# EAGLE board HITB_AMS_V1.3 (EAGLE 8.7.0)
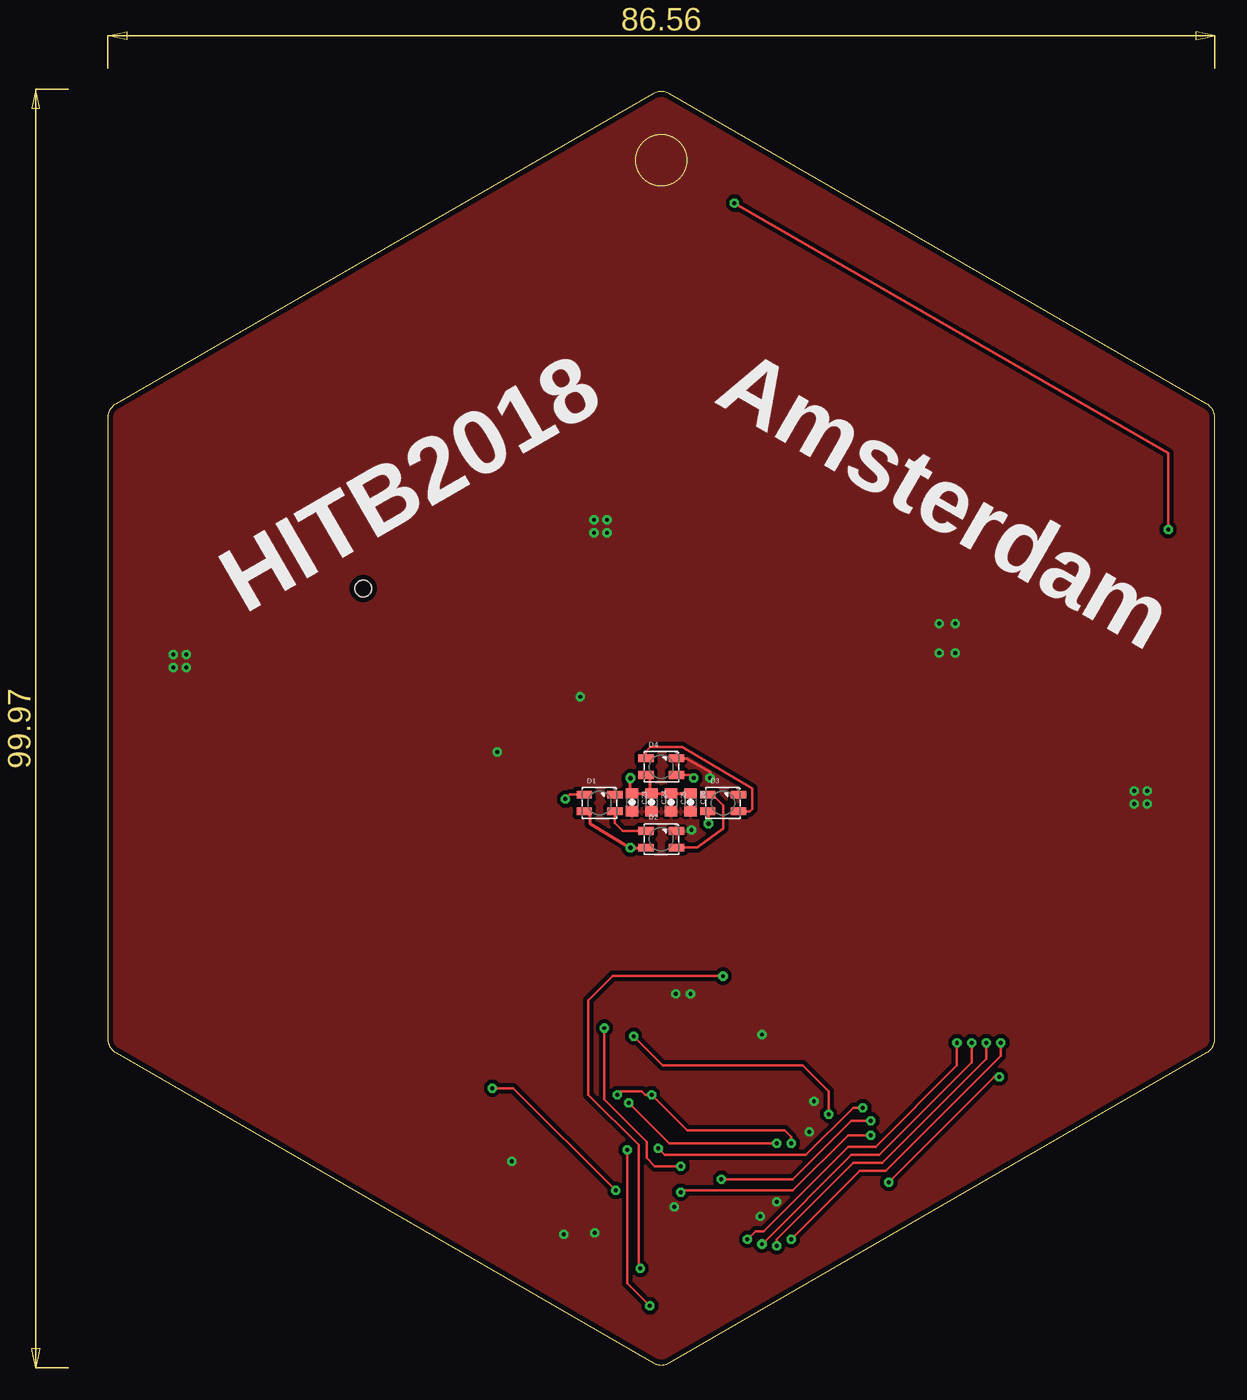
[diagram p0: board, top side]
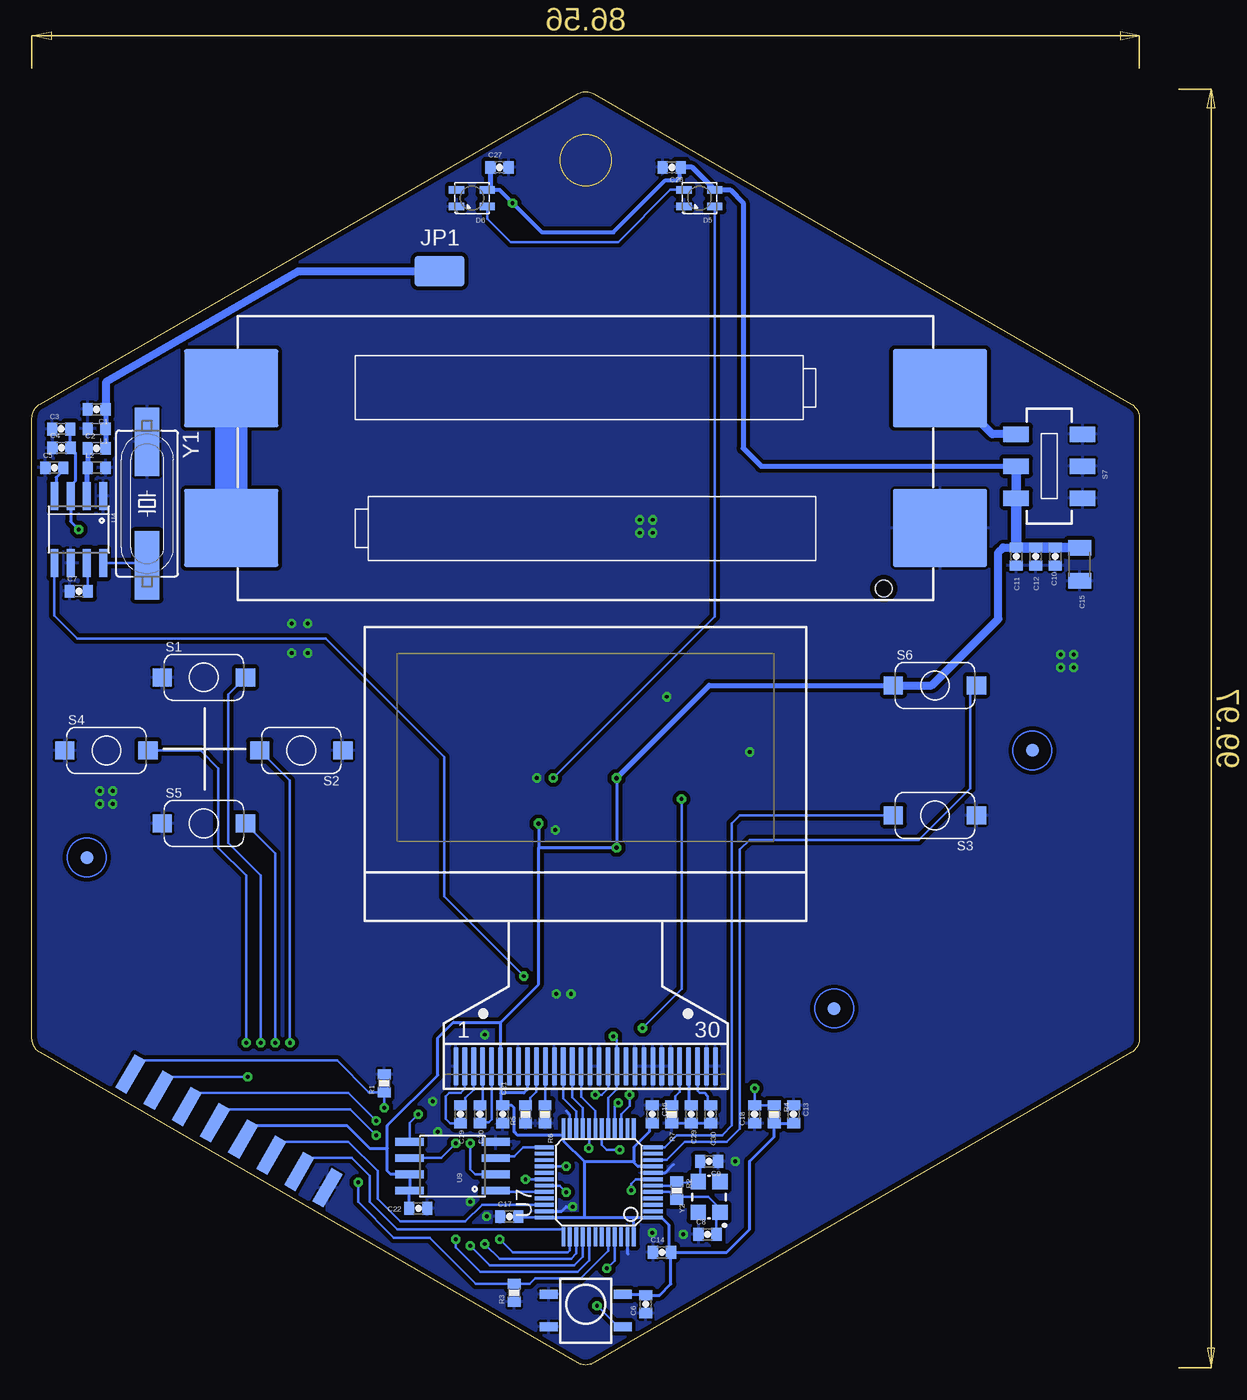
[diagram p1: board, bottom side, seen from below]

Size 86.56 x 99.58 mm. Coordinates in mm from the lower left corner, seen from the top.
Outline: 0.63,24.43 42.65,0.17 arc60 43.92,0.17 85.93,24.43 arc60 86.56,25.53 86.56,74.05 arc60 85.93,75.15 43.92,99.41 arc60 42.65,99.41 0.63,75.15 arc60 0,74.05 0,25.53 arc60 0.63,24.43
Copper layers (1*16): Top 0.035mm / dielectric 1.5mm / Bottom 0.035mm
Design rules "yun": minimum track width 8mil, minimum drill 12mil, track to track 6mil, track to pad 6mil, pad to pad 6mil, via to via 6mil, smd to smd 6mil, copper to edge 16mil, drill to drill 8mil, minimum pad ring 8mil, minimum via ring 8mil, stop-mask expansion 4mil, vias tented up to drill 20mil, thermal gap 8mil
Net classes: 0 default: width 0.254 mm, clearance 0.254 mm
Milling: area 41.3,92.2 to 45.3,96.2

## Footprints (pad centres in the part's own frame; a part is rotated, then mirrored left to right if it is on the bottom)
0603-CAP = smd 0.8 x 1: 1 -0.7,0; 2 0.7,0
1206 = smd 1.2 x 1.8: 1 -1.3,0; 2 1.3,0
RGB_2427 = smd 1.2 x 0.6: 1 1.2,-0.65; 2 1.2,0.65; 3 -1.2,0.65; 4 -1.2,-0.65
LUXEON-PAD = smd 3.9 x 2.4: P$1 0,0
1X04_TEST_2 = smd 1 x 3: 1 -3.81,-0.08; 2 -1.27,-0.08; 3 1.27,-0.08; 4 3.81,-0.08
0603 = smd 0.8 x 1: 1 -0.7,0; 2 0.7,0
0603-RES = smd 0.8 x 1: 1 -0.7,0; 2 0.7,0
BUTTON_TSSURX = smd 1.5 x 1.4: P$1 -3.25,0; P$2 3.25,0
MSS22D18 = smd 1.2 x 2: 1 -2.5,2.6; 2 0,2.6; 3 2.5,2.6; 4 -2.5,-2.6; 5 0,-2.6; 6 2.5,-2.6
FIDUCIA-MOUNT = smd 1.016 x 1.016: P$1 0,0
SO08 = smd 2.21 x 0.61: 1 -2.616,1.905; 2 -2.616,0.635; 3 -2.616,-0.635; 4 -2.616,-1.905; 5 2.616,-1.905; 6 2.616,-0.635; 7 2.616,0.635; 8 2.616,1.905
IR_RECEIVE = smd 0.7 x 1.4: 1 1.27,2.9; 2 -1.27,2.9; 3 -1.27,-2.9; 4 1.27,-2.9
TQFP48 = smd 0.3 x 1.5: 1 -2.75,-4.25; 2 -2.25,-4.25; 3 -1.75,-4.25; 4 -1.25,-4.25; 5 -0.75,-4.25; 6 -0.25,-4.25; 7 0.25,-4.25; 8 0.75,-4.25; 9 1.25,-4.25; 10 1.75,-4.25; 11 2.25,-4.25; 12 2.75,-4.25; 25 2.75,4.25; 26 2.25,4.25; 27 1.75,4.25; 28 1.25,4.25; 29 0.75,4.25; 30 0.25,4.25; 31 -0.25,4.25; 32 -0.75,4.25; 33 -1.25,4.25; 34 -1.75,4.25; 35 -2.25,4.25; 36 -2.75,4.25 | smd 1.5 x 0.3: 13 4.25,-2.75; 14 4.25,-2.25; 15 4.25,-1.75; 16 4.25,-1.25; 17 4.25,-0.75; 18 4.25,-0.25; 19 4.25,0.25; 20 4.25,0.75; 21 4.25,1.25; 22 4.25,1.75; 23 4.25,2.25; 24 4.25,2.75; 37 -4.25,2.75; 38 -4.25,2.25; 39 -4.25,1.75; 40 -4.25,1.25; 41 -4.25,0.75; 42 -4.25,0.25; 43 -4.25,-0.25; 44 -4.25,-0.75; 45 -4.25,-1.25; 46 -4.25,-1.75; 47 -4.25,-2.25; 48 -4.25,-2.75
BATTER_AAA_3 = smd 7.35 x 6.08: A+ 27.7,5.461; A- -27.7,5.461; B+ -27.7,-5.461; B- 27.7,-5.461 | hole 1.3: -23.3,10.2
SO08-EIAJ = smd 0.61 x 2.21: 1 -1.905,-3.378; 2 -0.635,-3.378; 3 0.635,-3.378; 4 1.905,-3.378; 5 1.905,3.353; 6 0.635,3.353; 7 -0.635,3.353; 8 -1.905,3.353
OLED_12864_1.3 = smd 0.4 x 3: 1 -10.15,-11.365; 2 -9.45,-11.365; 3 -8.75,-11.365; 4 -8.05,-11.365; 5 -7.35,-11.365; 6 -6.65,-11.365; 7 -5.95,-11.365; 8 -5.25,-11.365; 9 -4.55,-11.365; 10 -3.85,-11.365; 11 -3.15,-11.365; 12 -2.45,-11.365; 13 -1.75,-11.365; 14 -1.05,-11.365; 15 -0.35,-11.365; 16 0.35,-11.365; 17 1.05,-11.365; 18 1.75,-11.365; 19 2.45,-11.365; 20 3.15,-11.365; 21 3.85,-11.365; 22 4.55,-11.365; 23 5.25,-11.365; 24 5.95,-11.365; 25 6.65,-11.365; 26 7.35,-11.365; 27 8.05,-11.365; 28 8.75,-11.365; 29 9.45,-11.365; 30 10.15,-11.365
HC49UP = smd 5.334 x 1.93: 1 -4.826,0; 2 4.826,0
CRYSTAL-SMD-3225 = smd 1.2 x 1.2: 1 -1.2,-0.85; 2 1.2,-0.85; 3 1.2,0.85; 4 -1.2,0.85

## Placement (x,y rotation side)
C1  5.6pF NP0  [0603-CAP]  81.51,74.73 180 bottom
C2  1.5pF  [0603-CAP]  81.51,71.69 0 bottom
C3  100pF  [0603-CAP]  84.28,73.2 0 bottom
C4  0.1uF  [0603-CAP]  84.26,71.72 0 bottom
C5  0.47uF  [0603-CAP]  84.81,70.16 0 bottom
C6  0.1uF  [0603-CAP]  38.58,4.76 90 bottom
C7  1uF  [0603-CAP]  82.91,60.51 0 bottom
C8  22pF  [0603-CAP]  33.76,10.22 0 bottom
C9  22pF  [0603-CAP]  33.63,15.93 180 bottom
C10  1uF  [0603-CAP]  6.58,63.23 90 bottom
C11  10uF  [0603-CAP]  9.63,63.23 90 bottom
C12  22uF  [0603-CAP]  8.1,63.23 90 bottom
C13  0.1uF  [0603-CAP]  27.03,19.62 270 bottom
C14  0.1uF  [0603-CAP]  37.31,8.82 0 bottom
C15  47uF  [1206]  4.67,62.62 270 bottom
C16  0.1uF  [0603-CAP]  38.07,19.62 270 bottom
C17  0.1uF  [0603-CAP]  49.25,11.61 0 bottom
C18  0.1uF  [0603-CAP]  30.07,19.62 90 bottom
C19  1uF 16V X5R  [0603-CAP]  53.06,19.62 270 bottom
C20  1uF 16V X5R  [0603-CAP]  51.54,19.62 270 bottom
C21  1uF  [0603-CAP]  49.76,19.62 270 bottom
C22  1uF  [0603-CAP]  56.36,12.25 0 bottom
C23  0.1uF  [0603-CAP]  41,44 270 top
C24  0.1uF  [0603-CAP]  42.52,44 270 top
C25  0.1uF  [0603-CAP]  44.04,44 270 top
C26  0.1uF  [0603-CAP]  45.57,44 270 top
C27  0.1uF  [0603-CAP]  50.01,93.66 0 bottom
C28  0.1uF  [0603-CAP]  36.55,93.66 180 bottom
C29  4.7uF 16V X7R  [0603-CAP]  35.03,19.62 270 bottom
C30  2.2uF  [0603-CAP]  33.5,19.62 270 bottom
D1  XT1511-2427  [RGB_2427]  38.46,43.95 0 top
D2  XT1511-2427  [RGB_2427]  43.28,41.11 0 top
D3  XT1511-2427  [RGB_2427]  48.11,43.95 0 top
D4  XT1511-2427  [RGB_2427]  43.28,46.79 0 top
D5  XT1511-2427  [RGB_2427]  34.39,91.24 180 bottom
D6  XT1511-2427  [RGB_2427]  52.17,91.24 180 bottom
JP1  M01SMD  [LUXEON-PAD]  54.71,85.53 0 bottom
JP2  [1X04_TEST_2]  75.61,20.78 150 bottom
JP3  [1X04_TEST_2]  66.8,15.7 150 bottom
L1  22nH  [0603]  81.51,73.21 180 bottom
L2  27nH  [0603]  81.51,70.16 0 bottom
R1  10k  [0603-RES]  59.03,22.03 90 bottom
R2  10M  [0603-RES]  36.17,13.65 270 bottom
R3  10k  [0603-RES]  48.87,5.65 90 bottom
R4  10k  [0603-RES]  28.55,19.62 270 bottom
R5  4k7  [0603-RES]  47.98,19.62 90 bottom
R6  4k7  [0603-RES]  46.46,19.62 90 bottom
R7  910K  [0603-RES]  36.55,19.62 90 bottom
S1  SWITCH_2_T  [BUTTON_TSSURX]  73.13,53.78 0 bottom
S2  SWITCH_2_T  [BUTTON_TSSURX]  65.51,48.06 180 bottom
S3  SWITCH_2_T  [BUTTON_TSSURX]  15.98,42.98 180 bottom
S4  SWITCH_2_T  [BUTTON_TSSURX]  80.75,48.06 0 bottom
S5  SWITCH_2_T  [BUTTON_TSSURX]  73.13,42.35 0 bottom
S6  SWITCH_2_T  [BUTTON_TSSURX]  15.98,53.14 0 bottom
S7  SWITCH-DPDT  [MSS22D18]  7.04,70.29 90 bottom
U1  FIDUCIALMOUNT  [FIDUCIA-MOUNT]  23.85,27.87 0 bottom
U2  FIDUCIALMOUNT  [FIDUCIA-MOUNT]  8.36,48.06 0 bottom
U3  FIDUCIALMOUNT  [FIDUCIA-MOUNT]  82.27,39.68 0 bottom
U4  SYN480R  [SO08]  82.91,65.34 270 bottom
U5  IRM-H638T/TR2  [IR_RECEIVE]  43.28,4.25 90 bottom
U6  360UNICORN_LOGO_0.8_STOP  [360UNICORN_S0.8]  83.03,25.97 0 bottom
U7  STM32F103C8T6  [TQFP48]  42.27,14.28 90 bottom
U8  BATTER_AAA_2_3  [BATTER_AAA_3]  43.28,70.92 180 bottom
U9  W25Q32  [SO08-EIAJ]  53.7,15.55 90 bottom
U10  OLED_12864_1.3  [OLED_12864_1.3]  43.28,34.73 0 bottom
Y1  6.7458MHz  [HC49UP]  77.57,67.37 270 bottom
Y2  8MHz  [CRYSTAL-SMD-3225]  33.63,13.14 90 bottom

## Library data of the parts
C1-C30 D1-D6 JP1-JP3 L1 L2 R1-R7 S1-S6 U1-U10 Y1 Y2 = 2SparkFun
S7 = 0SparkFun

## Nets
3.3V: C3.2 C4.2 C6.2 C10.2 C11.2 C12.2 C13.2 C14.2 C15.1 C16.2 C17.2 C21.1 C22.1 C23.1 C24.1 C25.1 C26.1 C27.1 C28.1 D1.4 D2.4 D3.4 D4.4 D5.4 D6.4 JP3.4 R4.2 S6.P$1 S7.1 S7.2 U4.3 U5.4 U7.1 U7.9 U7.24 U7.36 U7.48 U9.7 U9.8 U10.6 U10.9
11: U7.46
111: U7.13
222: U7.14
333: U7.29
ANT: C1.1 C2.2 JP1.P$1 L1.1
BOOT_CFG1_5: U7.33
GND: C1.2 C3.1 C4.1 C5.1 C6.1 C7.1 C8.1 C9.1 C10.1 C11.1 C12.1 C13.1 C14.1 C15.2 C16.1 C17.1 C18.1 C21.2 C22.2 C23.2 C24.2 C25.2 C26.2 C27.2 C28.2 C29.2 C30.2 D1.2 D2.2 D3.2 D4.2 D5.2 D6.2 JP3.1 L1.2 L2.2 R1.2 R3.1 R5.1 R6.1 R7.1 S1.P$1 S2.P$1 S3.P$1 S4.P$1 S5.P$1 S7.4 S7.5 S7.6 U4.1 U4.6 U5.1 U5.2 U7.8 U7.23 U7.35 U7.47 U8.A- U9.4 U10.1 U10.8 U10.12 U10.16 U10.17 U10.21 U10.22 U10.23 U10.24 U10.25 U10.29 U10.30 Y1.1
I2C1_SCL: U7.42
I2C1_SDA: U7.43
IR: U5.3 U7.18
KEY_DOWN: S5.P$2 U7.39
KEY_ESC: S3.P$2 U7.12
KEY_LEFT: S4.P$2 U7.41
KEY_OK: S6.P$2 U7.10
KEY_RIGHT: S2.P$2 U7.38
KEY_UP: S1.P$2 U7.40
LCD_A0: U7.19 U10.15
LCD_CS: U7.22 U10.13
LCD_RES: U7.21 U10.14
MISO: U7.16 U9.2
MISO2: U7.27
MOSI: U7.17 U9.5 U10.19
MOSI2: D1.3 U7.28
N$1: D3.1 D4.3
N$2: C8.2 R2.2 U7.5 Y2.1
N$3: R5.2 U10.10
N$4: C9.2 R2.1 U7.6 Y2.3
N$5: U8.A+ U8.B-
N$6: D4.1 D5.3
N$8: D5.1 D6.3
N$14: S7.3 U8.B+
N$15: C29.1 U10.27
N$16: C19.2 U10.2
N$17: C19.1 U10.3
N$18: C20.1 U10.4
N$19: C20.2 U10.5
N$21: C30.1 U10.28
N$22: R7.2 U10.26
N$23: R6.2 U10.11
N$25: C2.1 L2.1 U4.2
N$33: C5.2 U4.4
N$34: C7.2 U4.7
N$35: U4.8 Y1.2
N$53: D2.1 D3.3
N$65: D1.1 D2.3
RF: U4.5 U7.45
RF_CS_2: U7.11
SCK: U7.15 U9.6 U10.18
SCK2: U7.26
STM32_BOOT0: JP2.3 R3.2 U7.44
STM32_BOOT1: JP2.4 R1.1 U7.20
STM32_RST: C18.2 R4.1 U7.7
STM32_RX: JP2.1 U7.31
STM32_TX: JP2.2 U7.30
SWCLK: JP3.2 U7.37
SWDIO: JP3.3 U7.34
W25Q_CS: U7.32 U9.1
W25Q_WP: U7.25 U9.3

## Tracks (layer width: path | path; a pad name or v marks a point on that pad's centre or on a via)
3.3V  (via drill 0.3, 0.35)
  Top 0.203: v82.91,65.34 82.91,71.3 v49,90.86
  Top 0.254: 42.39,44.7 C23.1 40.87,44.83 v40.87,45.9 | 42.39,44.7 C24.1 C25.1 C26.1 | D4.4 42.39,45.93 42.39,44.7 | D3.4 46.96,43.26 v46.96,42.35 | D2.4 42.16,40.44 v40.87,40.44 37.69,42.35 37.69,42.97 D1.4
  Bottom 0.203: U7.36 48.47,11.53 C17.2
  Bottom 0.254: v40.87,45.9 v40.87,40.44 46.96,40.44 | U9.8 U9.7 58.52,14.92 58.78,15.17 58.78,16.95 | U9.8 57.11,13.71 | U7.36 43.41,11.53 | 43.41,11.53 39.47,11.53 | 39.47,11.53 U7.1 37.36,11.53 36.8,10.98 36.8,8.82 C14.2 | U7.48 39.52,11.49 39.47,11.53 | 39.47,15.93 39.47,17.08 38.33,18.22 38.33,18.66 C16.2 | 43.41,15.93 45.02,17.54 U7.24 45.02,18.01 45.06,17.96 48.62,17.96 48.87,18.22 48.87,20.12 49.06,20.32 C21.1 49.93,20.49 49.93,21.27 | 43.41,15.93 39.47,15.93 | U7.9 39.2,15.53 39.47,15.81 39.47,15.93 | 43.41,15.93 43.41,11.53 | v46.96,42.35 46.96,40.44 | C14.2 36.36,9.01 | U5.4 38.64,5.52 C6.2 37.5,5.46 36.61,6.35 C14.2 | U10.9 47.83,21.54 48.11,21.27 49.93,21.27 | C22.1 57.06,13.63 U9.8 | 58.78,16.95 58.78,18.73 54.84,22.66 54.84,25.58 53.61,26.81 49.93,26.81 | 49.93,26.81 U10.6 49.93,21.27 | 49.93,26.81 46.96,29.78 46.96,40.44 | JP3.4 69.01,18.73 61.95,18.73 60.17,16.95 58.78,16.95 | C3.2 83.56,73.17 C4.2 83.16,71.32 83.16,69.15 83.54,68.76 U4.3 83.54,65.97 v82.91,65.34 | C14.2 32.23,8.82 30.45,10.6 30.45,15.93 28.55,17.84 R4.2 C13.2
  Bottom 0.305: D6.4 50.03,91.89 v49,90.86 46.71,88.58 41.12,88.58 37.06,92.64 36.17,92.64 35.92,92.89 35.92,93.59 C28.1
  Bottom 0.406: v40.87,45.9 33.63,53.14 S6.P$1 | D6.4 50.71,92.15 C27.1 | C28.1 34.95,93.66 D5.4 31.99,91.89 30.96,90.86 30.96,71.69 29.57,70.29 S7.2
  Bottom 0.61: S6.P$1 16.23,53.14 11.02,58.35 11.02,63.56 10.64,63.94 9.64,63.94
  Bottom 0.762: S7.2 S7.1 | 4.64,63.95 C15.1 6.57,63.92 C10.2
  Bottom 0.813: C10.2 C12.2 C11.2 9.64,63.94 S7.1
ANT
  Bottom 0.406: C2.2 L1.1 C1.1
  Bottom 0.61: C1.1 80.75,74.8 80.75,76.89 65.76,85.53 JP1.P$1
GND  (via drill 0.3)
  Top 0.203: D4.2 45.25,47.44 47.09,46.36 v47.09,45.9
  Bottom 0.203: C30.2 C29.2 R7.1 | U7.23 44.52,19.58 44.81,19.87
  Bottom 0.254: U7.47 40.02,8.73 39.98,8.69 | U7.8 37.07,15.03 36.42,15.68 | U7.35 45.15,12.03 44.81,12.38 v44.3,12.38
  other vias: 80.24,43.87 80.24,44.89 81.25,43.87 81.25,44.89 5.13,54.54 5.13,55.56 6.15,54.54 6.15,55.56 38.02,65.08 38.02,66.1 39.04,65.08 39.04,66.1 66.27,57.97 65,55.68 45.57,29.01 45.64,41.84 51.03,11.61 38.07,10.34 35.66,10.22 54.84,18.22 55.22,20.63 52.3,12.76 51.16,25.84 44.42,29.01 30.45,47.94 36.93,52.25 65,57.97 66.27,55.68 31.6,15.93
  pour Top (isolate 0.305, rank 2): 0,-0.2 86.56,-0.2 86.56,99.78 0,99.78
  pour Bottom (isolate 0.305, rank 2): 0.1,-0.2 86.56,-0.2 86.56,99.78 0,99.78 0.1,42.35
IR  (via drill 0.3)
  Top 0.203: v40.61,16.82 40.61,6.41 v42.39,4.63
  Bottom 0.203: U5.3 40.74,2.98 v42.39,4.63 | U7.18 42.02,17.21 41.63,16.82 v40.61,16.82
KEY_DOWN  (via drill 0.3)
  Top 0.203: v67.54,25.2 67.54,23.68 60.3,16.44 58.14,16.44 v51.16,9.46
  Bottom 0.203: U7.39 44.02,8.72 44.42,8.31 50.01,8.31 v51.16,9.46 | v67.54,25.2 67.54,40.01 S5.P$2
KEY_ESC
  Bottom 0.203: U7.12 37.1,17.03 36.17,17.96 32.61,17.96 31.85,18.73 31.85,42.35 31.22,42.98 S3.P$2
KEY_LEFT  (via drill 0.3)
  Top 0.203: v69.82,25.2 69.82,24.19 60.81,15.17 58.78,15.17 v53.44,9.84
  Bottom 0.203: S4.P$2 73.38,48.06 71.98,46.67 71.98,40.44 69.82,38.28 v69.82,25.2 | U7.41 43.02,8.2 43.92,7.3 51.54,7.3 53.44,9.2 v53.44,9.84
KEY_OK
  Bottom 0.203: U7.10 36.96,16.03 35.53,17.46 32.23,17.46 31.22,18.47 31.22,40.32 30.45,41.08 17.25,41.08 13.23,45.09 13.23,52.64 S6.P$2
KEY_RIGHT  (via drill 0.3)
  Top 0.203: v66.4,25.2 66.4,23.43 60.05,17.08 57.89,17.08 51.28,10.47 50.65,10.47 v50.01,9.84
  Bottom 0.203: U7.38 44.52,8.98 44.68,8.82 49,8.82 v50.01,9.84 | v66.4,25.2 66.4,45.7 S2.P$2
KEY_UP  (via drill 0.3)
  Top 0.203: v68.68,25.2 68.68,23.93 60.55,15.81 58.27,15.81 52.3,9.84 v52.3,9.33
  Bottom 0.203: S1.P$2 71.22,52.43 71.22,40.82 68.68,38.28 v68.68,25.2 | U7.40 43.52,8.46 44.17,7.8 50.77,7.8 v52.3,9.33
LCD_A0
  Bottom 0.203: U7.19 42.52,19.87 43.63,20.98 U10.15
LCD_CS
  Bottom 0.203: U7.22 44.02,19.84 45.03,20.86 U10.13
LCD_RES
  Bottom 0.203: U7.21 43.52,20.1 44.33,20.92 U10.14
MISO  (via drill 0.3)
  Top 0.203: v40.74,20.5 43.92,17.33 v52.3,17.33
  Bottom 0.203: U7.16 41.02,20.23 v40.74,20.5 | U9.2 51.92,14.92 52.3,15.3 v52.3,17.33
MOSI  (via drill 0.3)
  Top 0.203: v56.36,19.62 56.36,21.39 54.33,23.43 43.41,23.43 v41.12,25.71
  Bottom 0.203: U7.17 41.52,20.87 40.83,21.56 U10.19 40.83,25.42 v41.12,25.71 | U9.5 57.05,18.93 v56.36,19.62
MOSI2  (via drill 0.3)
  Top 0.203: v35.79,44.25 36.14,44.6 D1.3 | v38.84,26.35 38.84,20.76 42.14,17.46 42.14,16.19 42.77,15.55 v44.81,15.55
  Bottom 0.203: v35.79,44.25 35.79,29.39 v38.84,26.35 | U7.28 46.5,15.55 v44.81,15.55
N$1
  Top 0.203: D3.1 50.21,43.3 50.39,43.49 50.39,45.09 44.93,48.32 42.42,48.32 42.08,47.98 D4.3
N$2
  Bottom 0.203: U7.5 36.75,13.53 R2.2 35.98,13.14 33.69,13.14 32.78,12.22 Y2.1 33.06,11.76 C8.2
N$3
  Bottom 0.203: R5.2 47.79,20.32 47.6,20.5 47.6,20.89 47.13,21.35 U10.10
N$4
  Bottom 0.203: C9.2 34.33,14.39 Y2.3 36.06,14.24 R2.1 36.48,14.03 U7.6
N$5
  Bottom 2.54: U8.A+ U8.B-
N$6  (via drill 0.3)
  Top 0.203: D4.1 44.5,46.16 45.57,46.16 v45.82,45.9
  Bottom 0.203: D5.3 33.19,58.53 v45.82,45.9
N$8
  Bottom 0.203: D6.3 50.97,89.66 49.12,87.81 40.74,87.81 36.66,91.89 D5.1
N$14
  Bottom 0.61: S7.3 11.49,72.79 15.09,76.38 U8.B+
N$15
  Bottom 0.254: U10.27 35.23,20.52 C29.1
N$16
  Bottom 0.203: C19.2 53.88,18.92 54.2,19.23 54.2,21.01 53.95,21.27 53.06,21.27 52.73,21.6 U10.2
N$17
  Bottom 0.203: C19.1 52.68,20.7 52.68,20.89 52.03,21.53 U10.3
N$18
  Bottom 0.203: U10.4 51.33,20.52 C20.1
N$19
  Bottom 0.203: C20.2 51.55,18.98 50.85,18.98 50.63,19.2 U10.5
N$21
  Bottom 0.203: C30.1 33.72,20.58 33.72,21.02 33.97,21.27 34.36,21.27 34.53,21.45 U10.28
N$22
  Bottom 0.203: R7.2 36.36,20.32 36.3,20.38 36.3,21.01 35.93,21.38 U10.26
N$23
  Bottom 0.203: R6.2 46.43,20.34 U10.11
N$25
  Bottom 0.406: U4.2 82.27,70.1 L2.1 C2.1
N$33
  Bottom 0.254: C5.2 84.11,69.97 84.68,69.4 84.68,68.08 U4.4
N$34
  Bottom 0.203: C7.2 82.21,62.65 U4.7
N$35
  Bottom 0.203: U4.8 77.62,62.72 Y1.2
N$53
  Top 0.203: D3.3 47.25,44.6 48.11,43.75 48.11,41.94 46.1,40.46 D2.1
N$65
  Top 0.203: D1.1 39.66,42.39 40.28,41.76 D2.3
RF  (via drill 0.3)
  Top 0.203: v41.63,7.55 41.5,7.68 41.5,17.2 37.57,21.14 37.57,28.51 39.47,30.41 v48.11,30.41
  Bottom 0.203: U7.45 41.02,8.17 v41.63,7.55 | U4.5 84.81,58.6 83.03,56.83 63.6,56.83 54.33,47.56 54.33,36.63 v48.11,30.41
SCK  (via drill 0.3)
  Top 0.203: v39.85,21.14 40.11,21.39 41.76,21.39 42.01,21.14 v42.52,21.14 45.31,18.35 52.93,18.35 53.44,17.84 v53.44,17.33
  Bottom 0.203: U10.18 41.53,21.62 42.01,21.14 v42.52,21.14 | U7.15 40.52,19.59 39.85,20.25 v39.85,21.14 | U9.6 54.58,16.19 v53.44,17.33
STM32_BOOT0  (via drill 0.3)
  Top 0.203: v61.06,14.28 69.32,22.54 v69.7,22.54
  Bottom 0.203: JP2.3 75.62,22.54 v69.7,22.54 | v61.06,14.28 61.06,12.76 58.27,9.96 55.47,9.96 51.86,6.35 R3.2 47.66,6.35 47.22,6.79 43.66,6.79 41.52,8.94 U7.44
STM32_BOOT1  (via drill 0.3)
  Top 0.203: v59.03,20.12 58.27,20.12 54.58,16.44 43.54,16.44 v43.03,16.95
  Bottom 0.203: U7.20 43.02,16.96 v43.03,16.95 | JP2.4 77.82,23.81 62.71,23.81 60.23,21.33 R1.1 v59.03,20.12
STM32_RST  (via drill 0.3)
  Top 0.203: v39.73,13.65 31.72,21.65 v30.07,21.65
  Bottom 0.203: U7.7 39.35,14.53 39.73,14.15 v39.73,13.65 | v30.07,21.65 C18.2 R4.1
STM32_RX  (via drill 0.3)
  Top 0.203: v59.66,17.96 57.89,17.96 53.57,13.65 44.93,13.65 v44.81,13.52
  Bottom 0.203: U7.31 45.32,14.03 v44.81,13.52 | JP2.1 71.22,20 61.7,20 v59.66,17.96
STM32_TX  (via drill 0.3)
  Top 0.203: v47.98,14.54 53.57,14.54 58.14,19.11 v59.66,19.11
  Bottom 0.203: U7.30 v47.98,14.53 v47.98,14.54 | JP2.2 73.42,21.27 61.82,21.27 v59.66,19.11
SWCLK
  Bottom 0.203: U7.37 45.02,10.6 58.01,10.6 60.17,12.76 60.17,14.79 61.57,16.19 64.61,16.19 JP3.2 65.66,15.65
SWDIO
  Bottom 0.203: U7.34 51.38,12.53 52.68,11.23 57.76,11.23 59.54,13.01 59.54,15.17 61.82,17.46 66.81,17.46 JP3.3
W25Q_CS
  Bottom 0.203: U7.32 50.2,13.53 U9.1
W25Q_WP
  Bottom 0.203: U7.25 48.15,17.03 48.87,16.31 50.19,16.31 U9.3

## Text on the board
tPlace: HITB2018 | Amsterdam
bStop: ON | OFF | OK | ESC | WhiteA10n3 & xwings & klks84 | HITB2018AMS